# Altium PCB cm4-carrier-net.PcbDoc (part 2 of 2)
Units mm, origin at the board's own origin, x right, y up, seen from the top; angles counter-clockwise.
Board outline 91.42 x 56.51 mm, 4 copper layers (F.Cu, In1.Cu, In2.Cu, B.Cu); 70 components, 204 nets, 587 pads, 137 vias.
Unrouted connection lines stored in the file: 70.
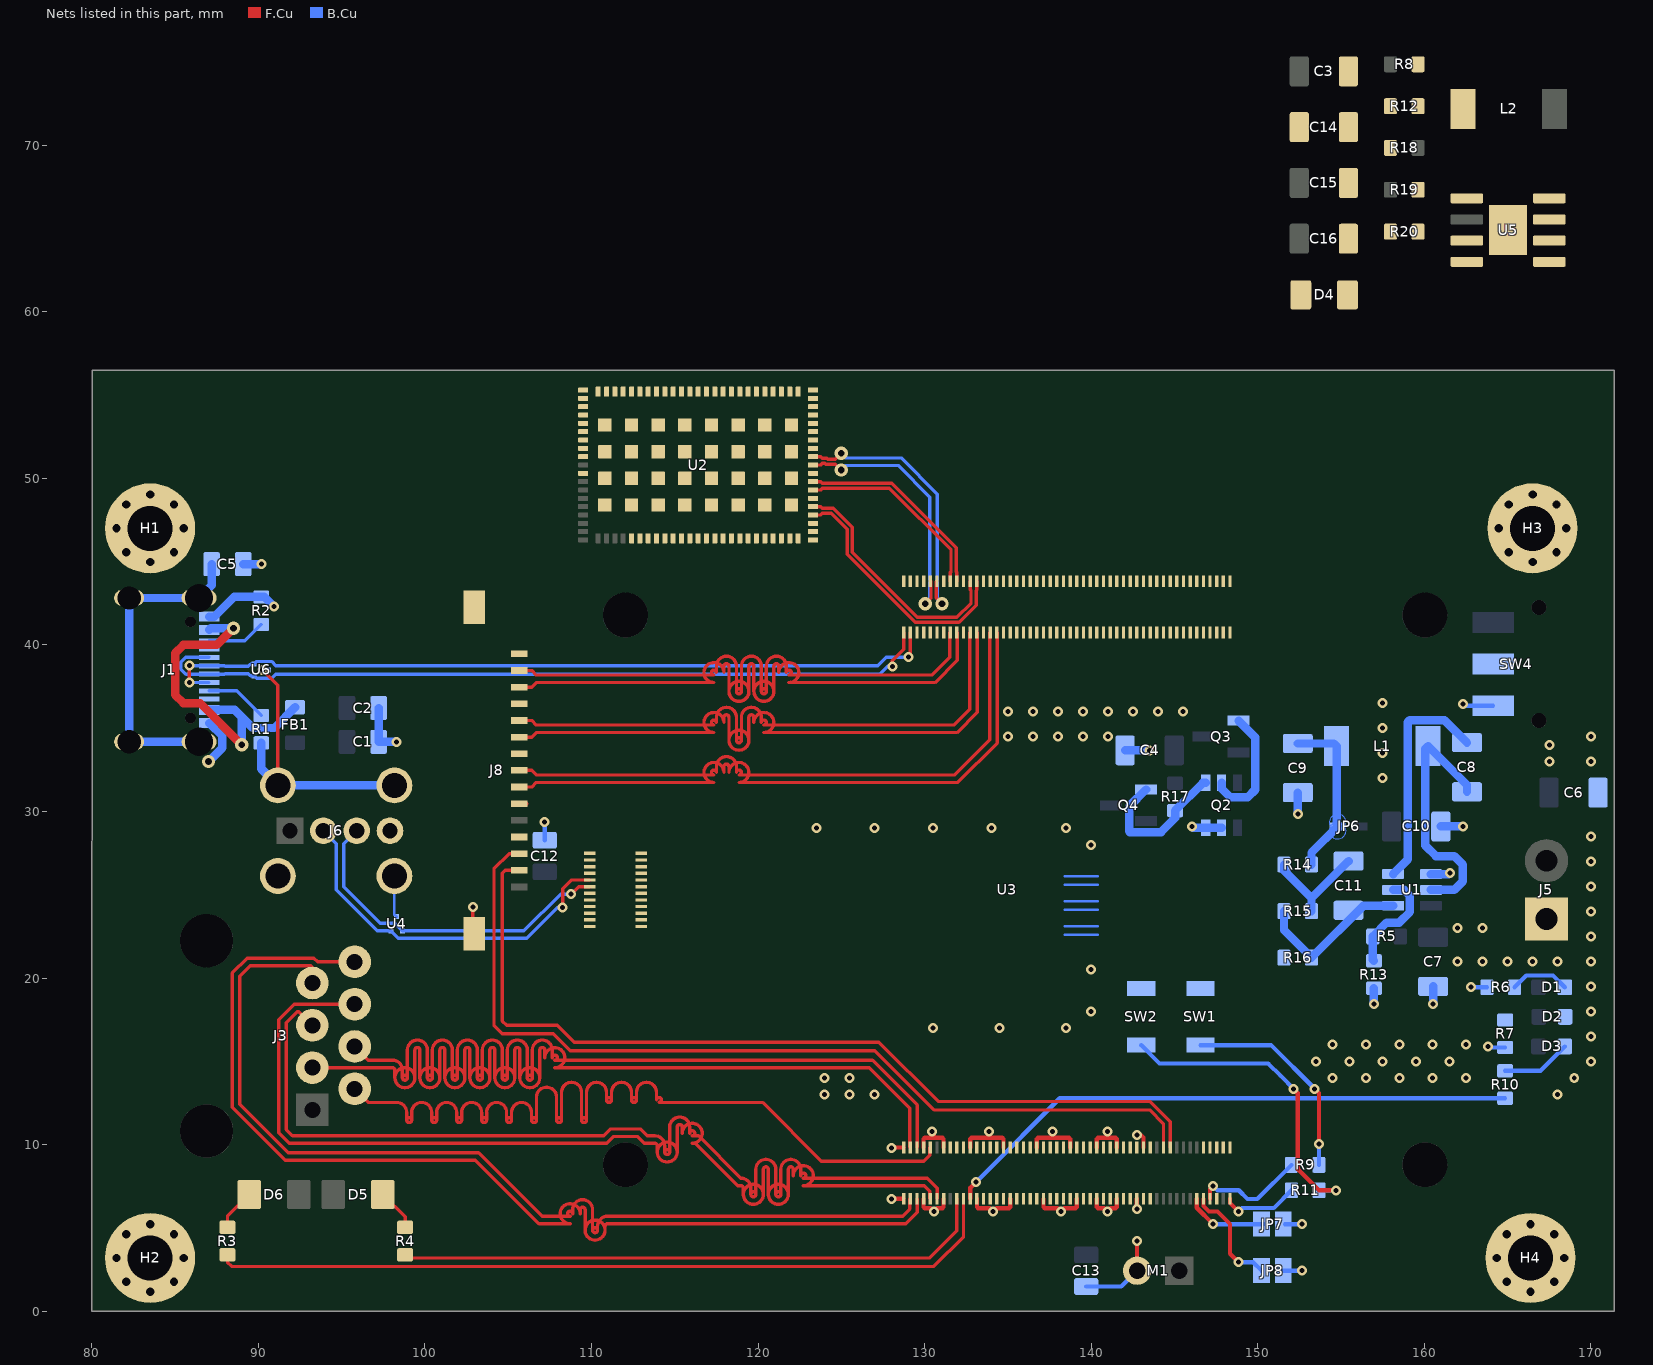
[diagram p4: the nets of this part, all layers, seen from the top]

## Via types
v1: diameter 0.6, hole 0.3, F.Cu to B.Cu, tented both sides, 130 vias
v2: diameter 0.8, hole 0.4, F.Cu to B.Cu, tented both sides, 7 vias

## Nets (pads, with @x,y where several pads share a name; then routed paths per layer and width w, separated by ;. In a path a pad name is that pad's centre, name@x,y a point inside that pad or via, vN(x,y) a via of type N, cw(c..) or ccw(c..) an arc to the next point about the centre after c; other vN are vias at no path point) (continued)
E0_TR0-: J3.2 U3.JP1_10 | length 71
  F.Cu w0.2: J3.2@95.778,13.356 96.598,12.536 98.298,12.536 cw(c98.298,11.936) 98.898,11.936 98.898,11.476 cw(c99.048,11.476) 99.048,11.326 cw(c99.048,11.476) 99.198,11.476 99.198,11.936 cw(c99.798,11.936) 99.798,12.536 cw(c99.798,11.936) 100.398,11.936 100.398,11.476 cw(c100.548,11.476) 100.548,11.326 cw(c100.548,11.476) 100.698,11.476 100.698,11.936 cw(c101.298,11.936) 101.298,12.536 cw(c101.298,11.936) 101.898,11.936 101.898,11.476 cw(c102.048,11.476) 102.048,11.326 cw(c102.048,11.476) 102.198,11.476 102.198,11.936 cw(c102.798,11.936) 102.798,12.536 cw(c102.798,11.936) 103.398,11.936 103.398,11.476 cw(c103.548,11.476) 103.548,11.326 cw(c103.548,11.476) 103.698,11.476 103.698,11.936 cw(c104.298,11.936) 104.298,12.536 cw(c104.298,11.936) 104.898,11.936 104.898,11.476 cw(c105.048,11.476) 105.048,11.326 cw(c105.048,11.476) 105.198,11.476 105.198,11.936 cw(c105.798,11.936) 105.798,12.536 cw(c105.798,11.936) 106.398,11.936 106.398,11.476 cw(c106.548,11.476) 106.548,11.326 cw(c106.548,11.476) 106.698,11.476 106.698,11.936 106.698,12.876 cw(c107.263,12.876) 107.263,13.441 107.333,13.441 cw(c107.333,12.876) 107.898,12.876 107.898,12.536 107.898,11.476 cw(c108.048,11.476) 108.048,11.326 cw(c108.048,11.476) 108.198,11.476 108.198,12.086 108.198,13.145 cw(c108.798,13.145) 108.798,13.745 cw(c108.798,13.145) 109.398,13.145 109.398,12.536 109.398,11.476 cw(c109.548,11.476) 109.548,11.326 cw(c109.548,11.476) 109.698,11.476 109.698,12.086 109.698,13.145 cw(c110.298,13.145) 110.298,13.745 cw(c110.298,13.145) 110.898,13.145 110.898,12.686 cw(c111.048,12.686) 111.048,12.536 cw(c111.048,12.686) 111.198,12.686 111.198,13.145 cw(c111.798,13.145) 111.798,13.745 cw(c111.798,13.145) 112.398,13.145 112.398,12.686 cw(c112.548,12.686) 112.548,12.536 cw(c112.548,12.686) 112.698,12.686 112.698,13.145 cw(c113.298,13.145) 113.298,13.745 cw(c113.298,13.145) 113.898,13.145 113.898,12.686 cw(c114.048,12.686) 114.048,12.536 114.986,12.536 120.264,12.536 123.791,9.009 129.955,9.009 130.311,9.365 130.311,9.809 U3.JP1_10@130.336,9.834
E0_TR1+: J3.3 U3.JP1_4 | length 88.5
  F.Cu w0.2: J3.3@93.238,14.626 98.044,14.626 cw(c98.044,14.476) 98.194,14.476 98.194,14.02 cw(c98.794,14.02) 98.794,13.42 cw(c98.794,14.02) 99.394,14.02 99.394,14.476 99.394,15.682 cw(c99.544,15.682) 99.544,15.832 cw(c99.544,15.682) 99.694,15.682 99.694,15.076 99.694,14.02 cw(c100.294,14.02) 100.294,13.42 cw(c100.294,14.02) 100.894,14.02 100.894,14.626 100.894,15.682 cw(c101.044,15.682) 101.044,15.832 cw(c101.044,15.682) 101.194,15.682 101.194,15.076 101.194,14.02 cw(c101.794,14.02) 101.794,13.42 cw(c101.794,14.02) 102.394,14.02 102.394,14.626 102.394,15.682 cw(c102.544,15.682) 102.544,15.832 cw(c102.544,15.682) 102.694,15.682 102.694,15.076 102.694,14.02 cw(c103.294,14.02) 103.294,13.42 cw(c103.294,14.02) 103.894,14.02 103.894,14.626 103.894,15.682 cw(c104.044,15.682) 104.044,15.832 cw(c104.044,15.682) 104.194,15.682 104.194,15.076 104.194,14.02 cw(c104.794,14.02) 104.794,13.42 cw(c104.794,14.02) 105.394,14.02 105.394,14.626 105.394,15.682 cw(c105.544,15.682) 105.544,15.832 cw(c105.544,15.682) 105.694,15.682 105.694,15.076 105.694,14.02 cw(c106.294,14.02) 106.294,13.42 cw(c106.294,14.02) 106.894,14.02 106.894,14.626 106.894,15.682 cw(c107.044,15.682) 107.044,15.832 cw(c107.044,15.682) 107.194,15.682 107.194,15.226 cw(c107.794,15.226) 107.794,14.626 109.099,14.626 126.682,14.626 129.111,12.197 129.111,9.859 U3.JP1_4@129.136,9.834
E0_TR1-: J3.4 U3.JP1_6 | length 68.7
  F.Cu w0.2: J3.4@95.778,15.896 96.598,15.076 98.044,15.076 cw(c98.044,14.476) 98.644,14.476 98.644,14.02 cw(c98.794,14.02) 98.794,13.87 cw(c98.794,14.02) 98.944,14.02 98.944,14.476 98.944,15.682 cw(c99.544,15.682) 99.544,16.282 cw(c99.544,15.682) 100.144,15.682 100.144,15.076 100.144,14.02 cw(c100.294,14.02) 100.294,13.87 cw(c100.294,14.02) 100.444,14.02 100.444,14.626 100.444,15.682 cw(c101.044,15.682) 101.044,16.282 cw(c101.044,15.682) 101.644,15.682 101.644,15.076 101.644,14.02 cw(c101.794,14.02) 101.794,13.87 cw(c101.794,14.02) 101.944,14.02 101.944,14.626 101.944,15.682 cw(c102.544,15.682) 102.544,16.282 cw(c102.544,15.682) 103.144,15.682 103.144,15.076 103.144,14.02 cw(c103.294,14.02) 103.294,13.87 cw(c103.294,14.02) 103.444,14.02 103.444,14.626 103.444,15.682 cw(c104.044,15.682) 104.044,16.282 cw(c104.044,15.682) 104.644,15.682 104.644,15.076 104.644,14.02 cw(c104.794,14.02) 104.794,13.87 cw(c104.794,14.02) 104.944,14.02 104.944,14.626 104.944,15.682 cw(c105.544,15.682) 105.544,16.282 cw(c105.544,15.682) 106.144,15.682 106.144,15.076 106.144,14.02 cw(c106.294,14.02) 106.294,13.87 cw(c106.294,14.02) 106.444,14.02 106.444,14.626 106.444,15.682 cw(c107.044,15.682) 107.044,16.282 cw(c107.044,15.682) 107.644,15.682 107.644,15.226 cw(c107.794,15.226) 107.794,15.076 109.099,15.076 126.868,15.076 129.561,12.383 129.561,9.859 U3.JP1_6@129.536,9.834
E0_TR2+: J3.5 U3.JP1_11 | length 64.8
  F.Cu w0.2: J3.5@93.238,17.166 92.418,17.986 92.324,17.986 91.665,17.327 91.665,10.909 92.041,10.533 110.734,10.533 111.145,10.944 112.927,10.944 113.338,10.533 113.792,10.533 cw(c113.792,9.933) 114.392,9.933 114.392,9.558 cw(c114.542,9.558) 114.542,9.408 cw(c114.542,9.558) 114.692,9.558 114.692,9.933 114.692,11.057 cw(c115.292,11.057) 115.292,11.657 cw(c115.292,11.057) 115.892,11.057 115.892,10.683 cw(c116.042,10.683) 116.042,10.533 116.425,10.533 118.965,7.993 cw(c118.965,7.393) 119.565,7.393 119.565,7.018 cw(c119.715,7.018) 119.715,6.868 cw(c119.715,7.018) 119.865,7.018 119.865,7.393 119.865,8.517 cw(c120.465,8.517) 120.465,9.117 cw(c120.465,8.517) 121.065,8.517 121.065,7.993 121.065,7.018 cw(c121.215,7.018) 121.215,6.868 cw(c121.215,7.018) 121.365,7.018 121.365,7.543 121.365,8.517 cw(c121.965,8.517) 121.965,9.117 cw(c121.965,8.517) 122.565,8.517 122.565,8.143 cw(c122.715,8.143) 122.715,7.993 126.148,7.993 130.156,7.993 130.761,7.388 130.761,6.779 U3.JP1_11@130.736,6.754
E0_TR2-: J3.6 U3.JP1_9 | length 79.1
  F.Cu w0.2: J3.6@95.778,18.436 92.138,18.436 91.215,17.513 91.215,10.723 91.855,10.083 110.921,10.083 111.332,10.494 112.74,10.494 113.151,10.083 113.792,10.083 cw(c113.792,9.933) 113.942,9.933 113.942,9.558 cw(c114.542,9.558) 114.542,8.958 cw(c114.542,9.558) 115.142,9.558 115.142,9.933 115.142,11.057 cw(c115.292,11.057) 115.292,11.207 cw(c115.292,11.057) 115.442,11.057 115.442,10.683 cw(c116.042,10.683) 116.042,10.083 116.239,10.083 118.779,7.543 118.965,7.543 cw(c118.965,7.393) 119.115,7.393 119.115,7.018 cw(c119.715,7.018) 119.715,6.418 cw(c119.715,7.018) 120.315,7.018 120.315,7.393 120.315,8.517 cw(c120.465,8.517) 120.465,8.667 cw(c120.465,8.517) 120.615,8.517 120.615,7.993 120.615,7.018 cw(c121.215,7.018) 121.215,6.418 cw(c121.215,7.018) 121.815,7.018 121.815,7.543 121.815,8.517 cw(c121.965,8.517) 121.965,8.667 cw(c121.965,8.517) 122.115,8.517 122.115,8.143 cw(c122.715,8.143) 122.715,7.543 126.148,7.543 129.97,7.543 130.311,7.202 130.311,6.779 U3.JP1_9@130.336,6.754
E0_TR3+: J3.7 U3.JP1_3 | length 61.5
  F.Cu w0.2: J3.7@93.238,19.706 93.238,20.658 93.145,20.751 89.501,20.751 88.871,20.121 88.871,12.433 91.787,9.517 103.217,9.517 107.027,5.707 108.712,5.707 cw(c108.712,5.857) 108.862,5.857 108.862,6.096 cw(c109.462,6.096) 109.462,6.696 cw(c109.462,6.096) 110.062,6.096 110.062,5.857 110.062,4.868 cw(c110.212,4.868) 110.212,4.718 cw(c110.212,4.868) 110.362,4.868 110.362,5.107 cw(c110.962,5.107) 110.962,5.707 112.617,5.707 128.685,5.707 129.111,6.133 129.111,6.729 U3.JP1_3@129.136,6.754
E0_TR3-: J3.8 U3.JP1_5 | length 69.7
  F.Cu w0.2: J3.8@95.778,20.976 93.556,20.976 93.331,21.201 89.315,21.201 88.421,20.307 88.421,12.247 91.601,9.067 103.031,9.067 106.841,5.257 108.712,5.257 cw(c108.712,5.857) 109.312,5.857 109.312,6.096 cw(c109.462,6.096) 109.462,6.246 cw(c109.462,6.096) 109.612,6.096 109.612,5.857 109.612,4.868 cw(c110.212,4.868) 110.212,4.268 cw(c110.212,4.868) 110.812,4.868 110.812,5.107 cw(c110.962,5.107) 110.962,5.257 112.617,5.257 128.871,5.257 129.561,5.947 129.561,6.729 U3.JP1_5@129.536,6.754
GND: C1.2 C2.2 C3.2 C4.2 C5.2 C6.2 C7.2 C9.2 C10.1 C12.2 C13.2 C15.2 C16.2 D4.2 H1.1 H2.1 H3.1 H4.1 J1.A1 J1.A12 J1.B1 J1.B12 J5.1 J6.4 J6.5 J8.1 J8.4 J8.7 J8.10 J8.MP JP7.1 JP8.1 M1.2 Q2.2 Q2.3 R1.1 R2.1 R6.2 R7.2 R12.2 R13.2 R16.2 R20.2 SW1.2 SW2.2 SW4.3 U1.1 U2.1 U2.2 U2.3 U2.6 U2.9 U2.12 U2.15 U2.16 U2.17 U2.18 U2.19 U2.20 U2.21 U2.22 U2.23 U2.24 U2.25 U2.26 U2.27 U2.28 U2.29 U2.30 U2.31 U2.32 U2.33 U2.34 U2.35 U2.36 U2.38 U2.39 U2.40 U2.41 U2.42 U2.43 U2.44 U2.45 U2.46 U2.47 U2.48 U2.51 U2.55 U2.68 U2.69 U2.70 U2.71 U2.72 U2.73 U2.74 U2.75 U2.79 U2.80 U2.81 U2.86 U2.87 U2.88 U2.89 U2.90 U2.91 U2.92 U2.93 U2.94 U2.95 U2.96 U2.97 U2.98 U2.99 U2.100 U2.101 U2.102 U2.103 U2.104 U2.105 U2.106 U2.107 U2.108 U2.109 U2.110 U2.111 U2.112 U2.113 U2.114 U2.115 U2.116 U2.117 U2.118 U2.119 U2.120 U3.JP1_1 U3.JP1_2 U3.JP1_7 U3.JP1_8 U3.JP1_13 U3.JP1_14 U3.JP1_22 U3.JP1_23 U3.JP1_32 U3.JP1_33 U3.JP1_42 U3.JP1_43 U3.JP1_52 U3.JP1_53 U3.JP1_59 U3.JP1_60 U3.JP1_65 U3.JP1_66 U3.JP1_71 U3.JP1_74 U3.JP1_98 U3.JP2_7 U3.JP2_8 U3.JP2_13 U3.JP2_14 U3.JP2_19 U3.JP2_20 U3.JP2_25 U3.JP2_26 U3.JP2_31 U3.JP2_32 U3.JP2_37 U3.JP2_38 U3.JP2_44 U3.JP2_50 U3.JP2_55 U3.JP2_56 U3.JP2_61 U3.JP2_62 U3.JP2_67 U3.JP2_68 U3.JP2_73 U3.JP2_74 U3.JP2_79 U3.JP2_80 U3.JP2_85 U3.JP2_86 U3.JP2_91 U3.JP2_92 U3.JP2_97 U3.JP2_98 U3.JP3_1 U3.JP3_2 U3.JP3_7 U3.JP3_13 U3.JP3_14 U3.JP3_17 U3.JP3_20 U3.JP3_23 U4.3 U5.7 U5.9 U6.3 | length 95.8
  F.Cu w0.2: v1(90.251,38.494) 91.168,37.577 J6.5@91.168,31.57 ; v1(102.87,24.278) 102.87,22.764 J8.MP@102.964,22.67
  F.Cu w0.254: J8.MP@102.964,42.17 J8.MP@102.964,42.27 ; J8.10@105.364,30.47 J8.10@105.664,30.47 J8.10@106.076,30.47 ; J8.7@105.364,33.47 J8.7@105.664,33.47 ; J8.4@105.364,36.47 J8.4@105.664,36.47 J8.4@105.51,36.47 ; J8.1@105.364,39.47 J8.1@105.664,39.47 ; v1(128.016,6.752) 128.018,6.754 U3.JP1_1@128.736,6.754 ; v1(128.016,9.8) 128.05,9.834 U3.JP1_2@128.736,9.834 ; U3.JP1_7@129.936,6.754 129.936,6.25 130.009,6.177 130.369,6.177 v1(130.556,5.99) 130.743,6.177 131.063,6.177 131.136,6.25 U3.JP1_13@131.136,6.754 ; U3.JP1_8@129.936,9.834 129.936,10.338 130.009,10.411 130.556,10.411 ; v1(130.438,10.797) 130.556,10.679 130.556,10.411 ; U3.JP1_14@131.136,9.834 131.136,10.338 131.063,10.411 130.556,10.411 ; U3.JP1_22@132.736,9.834 132.736,10.338 132.809,10.411 133.858,10.411 ; U3.JP1_23@133.136,6.754 133.136,6.25 133.209,6.177 133.925,6.177 v1(134.112,5.99) 134.299,6.177 135.063,6.177 135.136,6.25 U3.JP1_33@135.136,6.754 ; v1(133.858,10.797) 133.858,10.411 ; U3.JP1_32@134.736,9.834 134.736,10.338 134.663,10.411 133.858,10.411 ; U3.JP1_42@136.736,9.834 136.736,10.338 136.809,10.411 137.668,10.411 ; U3.JP1_43@137.136,6.754 137.136,6.25 137.209,6.177 137.989,6.177 v1(138.176,5.99) 138.363,6.177 139.063,6.177 139.136,6.25 U3.JP1_53@139.136,6.754 ; v1(137.668,10.797) 137.668,10.411 ; U3.JP1_52@138.736,9.834 138.736,10.338 138.663,10.411 137.668,10.411 ; U3.JP1_59@140.336,6.754 140.336,6.25 140.409,6.177 140.783,6.177 v1(140.97,5.99) 141.157,6.177 141.463,6.177 141.536,6.25 U3.JP1_65@141.536,6.754 ; U3.JP1_60@140.336,9.834 140.336,10.338 140.409,10.411 140.97,10.411 ; v1(140.97,10.797) 140.97,10.411 ; U3.JP1_66@141.536,9.834 141.536,10.338 141.463,10.411 140.97,10.411 ; v1(142.735,6.14) U3.JP1_71@142.736,6.754 ; v1(142.748,4.212) 142.748,3.704 142.753,3.699 M1.2@142.753,2.434 ; v1(142.748,10.584) 142.99,10.584 143.136,10.438 U3.JP1_74@143.136,9.834
  B.Cu w0.15: J6.5@98.168,26.13 98.168,23.817 U4.3@98.298,23.687 ; 138.4,22.606 140.4,22.606 ; 138.4,23.106 140.4,23.106 ; 138.4,24.106 140.4,24.106 ; 138.4,24.606 140.4,24.606 ; 138.4,25.606 140.4,25.606 ; 138.4,26.106 140.4,26.106
  B.Cu w0.2: v1(90.251,38.494) 90.259,38.502 U6.3@90.595,38.502
  B.Cu w0.254: C12.2@107.188,28.276 v1(107.188,29.358) ; C13.2@139.7,1.484 141.803,1.484 M1.2@142.753,2.434 ; JP8.1@151.526,2.434 v1(152.654,2.434) ; JP7.1@151.638,5.228 v1(152.654,5.228) ; v1(162.306,36.47) 162.422,36.354 SW4.3@164.128,36.354 ; v1(162.814,19.452) R6.2@163.767,19.452 ; v1(163.83,15.896) 163.893,15.833 R7.2@164.846,15.833
  B.Cu w0.508: v2(87,33.006) 87.019,33.006 87.841,33.828 87.841,34.535 87.075,35.302 J1.B12@87.037,35.302 J1.B12@87.357,35.302 ; J1.B1@87.037,41.702 87.357,41.702 88.538,42.883 R2.1@90.17,42.883 90.361,42.883 v1(90.932,42.312) ; C5.2@89.088,44.852 v1(90.17,44.852) ; R1.1@90.17,34.121 90.17,32.568 J6.5@91.168,31.57 J6.5@98.168,31.57 ; C2.2@97.216,36.216 C1.2@97.216,34.184 v1(98.298,34.184) ; C4.2@142.035,33.676 v1(143.51,33.676) ; v1(146.05,29.104) 146.13,29.024 Q2.3@146.878,29.024 Q2.2@147.828,29.024 ; v1(152.4,29.866) C9.2@152.4,31.136 ; v1(156.972,18.436) R13.2@156.972,19.389 ; U1.1@160.396,26.244 161.478,26.244 v1(161.544,26.31) ; v1(160.528,18.436) C7.2@160.528,19.501 ; C10.1@160.987,29.104 v1(162.306,29.104)
  other v1: 124,13.006 125.5,13.006 127,13.006 168,13.006 124,14.006 125.5,14.006 154.5,14.006 156.5,14.006 158.5,14.006 160.5,14.006 162.5,14.006 169,14.006 153.5,15.006 155.5,15.006 157.5,15.006 159.5,15.006 161.5,15.006 170,15.006 154.5,16.006 156.5,16.006 158.5,16.006 160.5,16.006 162.5,16.006 170,16.506 130.5,17.006 134.5,17.006 138.5,17.006 140,18.006 170,18.006 170,19.506 140,20.506 162,21.006 163.5,21.006 165,21.006 166.5,21.006 168,21.006 170,21.006 170,22.506 162,23.006 163.5,23.006 170,24.006 170,25.506 170,27.006 140,28.006 170,28.506 123.5,29.006 127,29.006 130.5,29.006 134,29.006 138.5,29.006 157.5,32.006 167.5,33.006 170,33.006 157.5,33.506 167.5,34.006 135,34.506 136.5,34.506 138,34.506 139.5,34.506 141,34.506 170,34.506 157.5,35.006 135,36.006 136.5,36.006 138,36.006 139.5,36.006 141,36.006 142.5,36.006 144,36.006 145.5,36.006 157.5,36.506
HDMI_CEC: U3.JP2_51
HDMI_CK+: U3.JP2_88
HDMI_CK-: U3.JP2_90
HDMI_D0+: U3.JP2_82
HDMI_D0-: U3.JP2_84
HDMI_D1+: U3.JP2_76
HDMI_D1-: U3.JP2_78
HDMI_D2+: U3.JP2_70
HDMI_D2-: U3.JP2_72
HDMI_SCL: U3.JP2_100
HDMI_SDA: U3.JP2_99
I2C1_SCL0-: J8.13 U3.JP1_80 | length 55.4
  F.Cu w0.2: J8.13@105.664,27.47 105.046,27.47 104.14,26.564 104.14,17.166 104.648,16.658 107.696,16.658 108.712,15.642 127,15.642 130.556,12.086 143.51,12.086 144.336,11.26 U3.JP1_80@144.336,9.834
I2C1_SDA0+: J8.14 U3.JP1_82 | length 54.1
  F.Cu w0.2: J8.14@105.664,26.47 104.808,26.47 104.648,26.31 104.648,17.42 104.902,17.166 107.95,17.166 108.966,16.15 127.254,16.15 130.81,12.594 143.51,12.594 144.736,11.368 U3.JP1_82@144.736,9.834
MIPI_CSI_RX0_D0N: J8.2 U3.JP2_15 | length 40.1
  F.Cu w0.2: J8.2@105.664,38.47 106.414,38.47 106.689,38.195 117.348,38.195 cw(c117.348,38.345) 117.498,38.345 117.498,38.724 cw(c118.098,38.724) 118.098,39.324 cw(c118.098,38.724) 118.698,38.724 118.698,38.345 118.698,37.215 cw(c118.848,37.215) 118.848,37.065 cw(c118.848,37.215) 118.998,37.215 118.998,37.745 118.998,38.724 cw(c119.598,38.724) 119.598,39.324 cw(c119.598,38.724) 120.198,38.724 120.198,38.195 120.198,37.215 cw(c120.348,37.215) 120.348,37.065 cw(c120.348,37.215) 120.498,37.215 120.498,37.745 120.498,38.724 cw(c121.098,38.724) 121.098,39.324 cw(c121.098,38.724) 121.698,38.724 121.698,38.345 cw(c121.848,38.345) 121.848,38.195 122.54,38.195 130.439,38.195 131.511,39.267 U3.JP2_15@131.511,40.729
MIPI_CSI_RX0_D0P: J8.3 U3.JP2_17 | length 49.3
  F.Cu w0.2: J8.3@105.664,37.47 106.414,37.47 106.689,37.745 117.348,37.745 cw(c117.348,38.345) 117.948,38.345 117.948,38.724 cw(c118.098,38.724) 118.098,38.874 cw(c118.098,38.724) 118.248,38.724 118.248,38.345 118.248,37.215 cw(c118.848,37.215) 118.848,36.615 cw(c118.848,37.215) 119.448,37.215 119.448,37.745 119.448,38.724 cw(c119.598,38.724) 119.598,38.874 cw(c119.598,38.724) 119.748,38.724 119.748,38.195 119.748,37.215 cw(c120.348,37.215) 120.348,36.615 cw(c120.348,37.215) 120.948,37.215 120.948,37.745 120.948,38.724 cw(c121.098,38.724) 121.098,38.874 cw(c121.098,38.724) 121.248,38.724 121.248,38.345 cw(c121.848,38.345) 121.848,37.745 122.54,37.745 130.625,37.745 131.961,39.081 U3.JP2_17@131.961,40.729
MIPI_CSI_RX1_D0N: J8.5 U3.JP2_21 | length 39.1
  F.Cu w0.2: J8.5@105.664,35.47 106.414,35.47 106.689,35.195 117.348,35.195 cw(c117.348,35.345) 117.498,35.345 117.498,35.658 cw(c118.098,35.658) 118.098,36.258 cw(c118.098,35.658) 118.698,35.658 118.698,35.345 118.698,34.281 cw(c118.848,34.281) 118.848,34.131 cw(c118.848,34.281) 118.998,34.281 118.998,34.745 118.998,35.658 cw(c119.598,35.658) 119.598,36.258 cw(c119.598,35.658) 120.198,35.658 120.198,35.345 cw(c120.348,35.345) 120.348,35.195 121.01,35.195 131.757,35.195 132.711,36.149 U3.JP2_21@132.711,40.729
MIPI_CSI_RX1_D0P: J8.6 U3.JP2_23 | length 45.5
  F.Cu w0.2: J8.6@105.664,34.47 106.414,34.47 106.689,34.745 117.348,34.745 cw(c117.348,35.345) 117.948,35.345 117.948,35.658 cw(c118.098,35.658) 118.098,35.808 cw(c118.098,35.658) 118.248,35.658 118.248,35.345 118.248,34.281 cw(c118.848,34.281) 118.848,33.681 cw(c118.848,34.281) 119.448,34.281 119.448,34.745 119.448,35.658 cw(c119.598,35.658) 119.598,35.808 cw(c119.598,35.658) 119.748,35.658 119.748,35.345 cw(c120.348,35.345) 120.348,34.745 121.01,34.745 131.943,34.745 133.161,35.963 U3.JP2_23@133.161,40.729
MIPI_CSI_RX_CLK0N: J8.8 U3.JP2_27 | length 38.2
  F.Cu w0.2: J8.8@105.664,32.47 106.414,32.47 106.689,32.195 117.348,32.195 cw(c117.348,32.345) 117.498,32.345 117.498,32.7 cw(c118.098,32.7) 118.098,33.3 cw(c118.098,32.7) 118.698,32.7 118.698,32.345 cw(c118.848,32.345) 118.848,32.195 120.092,32.195 131.805,32.195 133.911,34.301 U3.JP2_27@133.911,40.729
MIPI_CSI_RX_CLK0P: J8.9 U3.JP2_29 | length 41.7
  F.Cu w0.2: J8.9@105.664,31.47 106.414,31.47 106.689,31.745 117.348,31.745 cw(c117.348,32.345) 117.948,32.345 117.948,32.7 cw(c118.098,32.7) 118.098,32.85 cw(c118.098,32.7) 118.248,32.7 118.248,32.345 cw(c118.848,32.345) 118.848,31.745 120.092,31.745 131.991,31.745 134.361,34.115 U3.JP2_29@134.361,40.729
Net-(C11-Pad1): C11.1 R14.2 R15.1 | length 6.6
  B.Cu w0.508: R14.2@151.575,26.818 151.575,26.45 153.225,24.8 ; R15.1@153.225,24.024 153.225,24.8 ; C11.1@155.448,27.023 153.225,24.8
Net-(D1-K): D1.1 R6.1 | length 3.6
  B.Cu w0.254: R6.1@165.417,19.452 166.119,20.154 167.725,20.154 D1.1@168.427,19.452
Net-(D2-K): D2.1 R7.1
Net-(D3-K): D3.1 R10.2 | length 4.2
  B.Cu w0.254: R10.2@164.846,14.435 166.967,14.435 D3.1@168.427,15.896
Net-(D4-K): C14.2 D4.1 L2.1 U5.8
Net-(D5-K): D5.1 R4.1 | length 2.5
  F.Cu w0.2: D5.1@97.47,7.006 98.806,5.669 R4.1@98.806,5.037
Net-(D6-K): D6.1 R3.1 | length 2.5
  F.Cu w0.2: R3.1@88.138,5.037 88.138,5.699 D6.1@89.444,7.006
Net-(J1-CC1): J1.A5 R1.2 | length 3.7
  B.Cu w0.2: J1.A5@87.037,37.252 88.689,37.252 R1.2@90.17,35.771
Net-(J1-CC2): J1.B5 R2.2 | length 3.5
  B.Cu w0.2: J1.B5@87.037,40.252 89.189,40.252 R2.2@90.17,41.233
Net-(J1-SHIELD): C5.1 J1.S1 | length 19.4
  B.Cu w0.508: J1.S1@86.437,34.182 J1.S1@82.237,34.182 J1.S1@82.237,42.822 J1.S1@86.437,42.822 87.188,43.573 C5.1@87.188,44.852
Net-(JP6-B): C9.1 JP6.2 L1.2 R14.1 | length 10.2
  B.Cu w0.508: C9.1@152.4,34.086 154.574,34.086 L1.2@154.73,33.93 154.73,29.172 JP6.2@154.798,29.104 153.225,27.531 R14.1@153.225,26.818
Net-(Q2-GATE): Q2.5 Q3.1 | length 7.3
  B.Cu w0.508: Q2.5@147.828,31.724 147.828,31.378 148.336,30.87 149.407,30.87 149.848,31.311 149.848,34.45 Q3.1@148.844,35.454
Net-(Q2-STAT): Q2.4 Q4.1 R17.2 | length 9
  B.Cu w0.508: Q4.1@143.29,31.324 142.286,30.32 142.286,28.804 142.32,28.77 144.192,28.77 145.034,29.612 R17.2@145.034,30.057 146.701,31.724 Q2.4@146.878,31.724
Net-(R9-Pad1): R9.1 SW1.1 | length 12.6
  F.Cu w0.254: v1(153.416,13.356) 153.67,13.102 v1(153.67,10.054)
  B.Cu w0.254: SW1.1@146.558,15.974 150.798,15.974 v1(153.416,13.356) ; R9.1@153.67,8.784 v1(153.67,10.054)
Net-(R11-Pad1): R11.1 SW2.1 | length 19
  F.Cu w0.254: v1(152.146,13.356) 152.4,13.102 152.4,8.53 153.67,7.26 v1(154.686,7.26)
  B.Cu w0.254: SW2.1@143.002,15.974 144.096,14.88 147.066,14.88 150.622,14.88 151.384,14.118 v1(152.146,13.356) ; R11.1@153.67,7.26 v1(154.686,7.26)
Net-(U1-BOOT): C8.1 U1.6 | length 13.6
  B.Cu w0.508: U1.6@158.12,26.244 159.004,27.127 159.004,35.362 159.126,35.484 161.211,35.484 C8.1@162.56,34.135
Net-(U1-EN): R5.2 R13.1 U1.5 | length 6.5
  B.Cu w0.508: R13.1@156.972,21.039 156.909,21.102 R5.2@156.909,22.5 157.738,23.329 158.496,23.329 159.137,23.97 159.137,24.94 158.783,25.294 U1.5@158.12,25.294
Net-(U1-FB): C11.2 R15.2 R16.1 U1.4 | length 9.7
  B.Cu w0.508: R15.2@151.575,24.024 151.575,22.88 R16.1@153.225,21.23 156.339,24.344 U1.4@158.12,24.344
Net-(U1-SW): C8.2 L1.1 U1.2 | length 15.6
  B.Cu w0.508: U1.2@160.396,25.294 161.798,25.294 162.306,25.802 162.306,26.818 161.798,27.326 160.693,27.326 160.058,27.961 160.058,33.758 L1.1@160.23,33.93 162.56,31.6 C8.2@162.56,31.185
Net-(U3A-{\B\T\_\D\I\S\}\)\: JP8.2 U3.JP1_91 | length 6.6
  F.Cu w0.254: U3.JP1_91@146.736,6.754 146.736,6.32 147.066,5.99 147.32,5.99 147.574,5.99 148.336,5.228 148.336,3.45 v1(148.844,2.942)
  B.Cu w0.254: v1(148.844,2.942) 149.718,2.942 JP8.2@150.226,2.434
Net-(U3A-{\W\L\_\D\I\S\}\)\: JP7.2 U3.JP1_89 | length 5
  F.Cu w0.254: U3.JP1_89@146.336,6.754 146.336,6.212 v1(147.32,5.228)
  B.Cu w0.254: v1(147.32,5.228) JP7.2@150.338,5.228
Net-(U5-BST): C14.1 U5.1
Net-(U5-EN): R8.2 R12.1 U5.3
Net-(U5-FB): R19.2 R20.1 U5.5
Net-(U5-PGOOD): R18.1 U5.4
PCIE_REFCLK_N: U2.10 U3.JP2_10 | length 16.1
  F.Cu w0.203: U2.10@123.3,50.806 123.75,50.806 123.848,50.903 124,50.903 124.05,50.853 124.644,50.853 v2(124.993,50.504) ; v2(130.034,42.484) 130.384,42.833 130.384,43.786 U3.JP2_10@130.336,43.834
  B.Cu w0.2: v2(124.993,50.504) 125.27,50.781 126,50.781 128.407,50.781 130.311,48.877 130.311,42.761 v2(130.034,42.484)
PCIE_REFCLK_P: U2.11 U3.JP2_12 | length 16.9
  F.Cu w0.203: U2.11@123.3,51.306 123.75,51.306 123.848,51.208 124.122,51.208 124.172,51.158 124.644,51.158 v2(124.993,51.507) ; U3.JP2_12@130.736,43.834 130.688,43.786 130.688,42.833 v2(131.038,42.484)
  B.Cu w0.2: v2(124.993,51.507) 125.27,51.231 126,51.231 128.593,51.231 130.761,49.063 130.761,42.761 v2(131.038,42.484)
PCIE_RX_N: U2.8 U3.JP2_18 | length 12.3
  F.Cu w0.203: U2.8@123.3,49.806 123.75,49.806 123.848,49.708 128.013,49.708 131.888,45.833 131.888,44.406 131.936,44.359 U3.JP2_18@131.936,43.834
PCIE_RX_P: U2.7 U3.JP2_16 | length 11.7
  F.Cu w0.203: U2.7@123.3,49.306 123.75,49.306 123.848,49.403 127.887,49.403 131.584,45.707 131.584,44.406 131.536,44.359 U3.JP2_16@131.536,43.834
PCIE_TX_N: U2.4 U3.JP2_24 | length 15.3
  F.Cu w0.203: U2.4@123.3,47.806 123.75,47.806 123.848,47.903 124.387,47.903 125.348,46.943 125.348,45.443 129.437,41.353 132.063,41.353 133.088,42.379 133.088,43.261 133.136,43.309 U3.JP2_24@133.136,43.834
PCIE_TX_P: U2.5 U3.JP2_22 | length 14.8
  F.Cu w0.203: U2.5@123.3,48.306 123.75,48.306 123.848,48.208 124.513,48.208 125.652,47.069 125.652,45.569 129.563,41.658 131.937,41.658 132.784,42.505 132.784,43.261 132.736,43.309 U3.JP2_22@132.736,43.834
PI_GLOBAL_EN: R11.2 U3.JP1_99 | length 4.7
  F.Cu w0.254: U3.JP1_99@148.336,6.754 148.336,6.498 v1(148.844,5.99)
  B.Cu w0.254: v1(148.844,5.99) 149.059,6.205 150.965,6.205 R11.2@152.02,7.26
PI_LED_nACT: R10.1 U3.JP1_21 | length 35
  F.Cu w0.254: U3.JP1_21@132.736,6.754 132.736,7.408 v1(133.096,7.768)
  B.Cu w0.254: v1(133.096,7.768) 133.604,8.276 138.113,12.785 R10.1@164.846,12.785
PI_nRPI_BOOT: R9.2 U3.JP1_93 | length 6.7
  F.Cu w0.254: U3.JP1_93@147.136,6.754 147.136,7.33 v1(147.32,7.514)
  B.Cu w0.254: v1(147.32,7.514) 147.574,7.26 148.861,7.26 149.388,6.733 149.969,6.733 R9.2@152.02,8.784
SD_CLK: U3.JP1_57
SD_CMD: U3.JP1_62
SD_D0: U3.JP1_63
SD_D1: U3.JP1_67
SD_D2: U3.JP1_69
SD_D3: U3.JP1_61
SD_PWR_ON: U3.JP1_75
unconnected-(J1-SBU1-PadA8): J1.A8
unconnected-(J1-SBU2-PadB8): J1.B8
unconnected-(J8-Pin_12-Pad12): J8.12
unconnected-(U2-CLKREQ_L-Pad78): U2.78
unconnected-(U2-INTR-Pad77): U2.77
unconnected-(U2-PGOOD4-Pad37): U2.37
unconnected-(U2-PMIC_EN-Pad53): U2.53
unconnected-(U2-RESERVED-Pad49): U2.49
unconnected-(U2-RESERVED-Pad50): U2.50
unconnected-(U2-RESERVED-Pad52): U2.52
unconnected-(U2-RESERVED-Pad84): U2.84
unconnected-(U2-RESERVED-Pad85): U2.85
unconnected-(U2-RST_L-Pad76): U2.76
unconnected-(U2-SD_ALARM-Pad82): U2.82
unconnected-(U2-USB2_D_N-Pad14): U2.14
unconnected-(U2-USB2_D_P-Pad13): U2.13
unconnected-(U2-USB_SEL-Pad83): U2.83
unconnected-(U3A-GPIO0_C6{slash}PWM7_IR-PadJP1_72): U3.JP1_72
unconnected-(U3A-GPIO0_D0{slash}UART2_RX_M0-PadJP1_51): U3.JP1_51
unconnected-(U3A-GPIO0_D1{slash}UART2_TX_M0-PadJP1_55): U3.JP1_55
unconnected-(U3A-GPIO1_A0{slash}I2C3_SDA_M0-PadJP1_36): U3.JP1_36
unconnected-(U3A-GPIO1_A1{slash}I2C3_SCL_M0-PadJP1_35): U3.JP1_35
unconnected-(U3A-GPIO3_C6{slash}I2S1_MCLK_M1-PadJP1_50): U3.JP1_50
unconnected-(U3A-GPIO3_C7{slash}I2S1_SCLK_M1-PadJP1_49): U3.JP1_49
unconnected-(U3A-GPIO3_D0{slash}I2S1_LRCK_M1-PadJP1_26): U3.JP1_26
unconnected-(U3A-GPIO3_D1{slash}I2S1_SDO_M1-PadJP1_25): U3.JP1_25
unconnected-(U3A-GPIO3_D2{slash}I2S1_SDI_M1-PadJP1_27): U3.JP1_27
unconnected-(U3A-GPIO3_D3-PadJP1_24): U3.JP1_24
unconnected-(U3A-GPIO3_D4-PadJP1_30): U3.JP1_30
unconnected-(U3A-GPIO3_D5-PadJP1_29): U3.JP1_29
unconnected-(U3A-GPIO3_D7-PadJP1_28): U3.JP1_28
unconnected-(U3A-GPIO4_A0-PadJP1_48): U3.JP1_48
unconnected-(U3A-GPIO4_A1-PadJP1_45): U3.JP1_45
unconnected-(U3A-GPIO4_A2-PadJP1_46): U3.JP1_46
unconnected-(U3A-GPIO4_A3-PadJP1_47): U3.JP1_47
unconnected-(U3A-GPIO4_A4-PadJP1_41): U3.JP1_41
unconnected-(U3A-GPIO4_A5-PadJP1_34): U3.JP1_34
unconnected-(U3A-GPIO4_A6{slash}SPI3_CS0_M0-PadJP1_39): U3.JP1_39
unconnected-(U3A-GPIO4_A7{slash}SPI3_CS1_M0-PadJP1_37): U3.JP1_37
unconnected-(U3A-GPIO4_B0{slash}SPI3_MISO_M0-PadJP1_40): U3.JP1_40
unconnected-(U3A-GPIO4_B2{slash}SPI3_MOSI_M0-PadJP1_44): U3.JP1_44
unconnected-(U3A-GPIO4_B3{slash}SPI3_CLK_M0-PadJP1_38): U3.JP1_38
unconnected-(U3A-GPIO4_B4{slash}I2C2_SDA_M1-PadJP1_58): U3.JP1_58
unconnected-(U3A-GPIO4_B5{slash}I2C2_SCL_M1-PadJP1_56): U3.JP1_56
unconnected-(U3A-GPIO4_C0-PadJP1_31): U3.JP1_31
unconnected-(U3A-GPIO4_C3-PadJP1_54): U3.JP1_54
unconnected-(U3A-RESERVED_JP1_16-PadJP1_16): U3.JP1_16
unconnected-(U3A-RESERVED_JP1_18-PadJP1_18): U3.JP1_18
unconnected-(U3A-RESERVED_JP1_20-PadJP1_20): U3.JP1_20
unconnected-(U3A-RESERVED_JP1_64-PadJP1_64): U3.JP1_64
unconnected-(U3A-RESERVED_JP1_73-PadJP1_73): U3.JP1_73
unconnected-(U3A-SARADC_VIN1-PadJP1_70): U3.JP1_70
unconnected-(U3A-SARADC_VIN2-PadJP1_96): U3.JP1_96
unconnected-(U3A-SARADC_VIN3-PadJP1_94): U3.JP1_94
unconnected-(U3A-SDMMC0_DET_L-PadJP1_76): U3.JP1_76
unconnected-(U3A-SW_RECOVERY-PadJP1_68): U3.JP1_68
unconnected-(U3A-WORK_LED-PadJP1_95): U3.JP1_95
unconnected-(U3A-{\E\X\T\R\S\T\}\-\P\a\d\J\P\1\_\1\0\0\)\: U3.JP1_100
unconnected-(U3A-{\R\E\S\E\T\}\-\P\a\d\J\P\1\_\9\2\)\: U3.JP1_92
unconnected-(U3B-EDP_SCL{slash}I2C4_SCL_M1-PadJP2_47): U3.JP2_47
unconnected-(U3B-EDP_SDA{slash}I2C4_SDA_M1-PadJP2_45): U3.JP2_45
unconnected-(U3B-EDP_TX_AUXN-PadJP2_66): U3.JP2_66
unconnected-(U3B-EDP_TX_AUXP-PadJP2_64): U3.JP2_64
unconnected-(U3B-EDP_TX_D0N-PadJP2_60): U3.JP2_60
unconnected-(U3B-EDP_TX_D0P-PadJP2_58): U3.JP2_58
unconnected-(U3B-EDP_TX_D1N-PadJP2_54): U3.JP2_54
unconnected-(U3B-EDP_TX_D1P-PadJP2_52): U3.JP2_52
unconnected-(U3B-EDP_TX_D2N-PadJP2_48): U3.JP2_48
unconnected-(U3B-EDP_TX_D2P-PadJP2_46): U3.JP2_46
unconnected-(U3B-EDP_TX_D3N-PadJP2_49): U3.JP2_49
unconnected-(U3B-EDP_TX_D3P-PadJP2_43): U3.JP2_43
unconnected-(U3B-HDMI_TX_HPD_PORT-PadJP2_53): U3.JP2_53
unconnected-(U3B-MIPI_CSI_RX0_D2N-PadJP2_33): U3.JP2_33
unconnected-(U3B-MIPI_CSI_RX0_D2P-PadJP2_35): U3.JP2_35
unconnected-(U3B-MIPI_CSI_RX0_D3N-PadJP2_39): U3.JP2_39
unconnected-(U3B-MIPI_CSI_RX0_D3P-PadJP2_41): U3.JP2_41
unconnected-(U3B-MIPI_CSI_RX1_D2N-PadJP2_28): U3.JP2_28
unconnected-(U3B-MIPI_CSI_RX1_D2P-PadJP2_30): U3.JP2_30
unconnected-(U3B-MIPI_CSI_RX1_D3N-PadJP2_34): U3.JP2_34
unconnected-(U3B-MIPI_CSI_RX1_D3P-PadJP2_36): U3.JP2_36
unconnected-(U3B-MIPI_CSI_RX_CLK1N-PadJP2_40): U3.JP2_40
unconnected-(U3B-MIPI_CSI_RX_CLK1P-PadJP2_42): U3.JP2_42
unconnected-(U3B-MIPI_DSI_TX0_CLKN-PadJP2_69): U3.JP2_69
unconnected-(U3B-MIPI_DSI_TX0_CLKP-PadJP2_71): U3.JP2_71
unconnected-(U3B-MIPI_DSI_TX0_D0N-PadJP2_57): U3.JP2_57
unconnected-(U3B-MIPI_DSI_TX0_D0P-PadJP2_59): U3.JP2_59
unconnected-(U3B-MIPI_DSI_TX0_D1N-PadJP2_63): U3.JP2_63
unconnected-(U3B-MIPI_DSI_TX0_D1P-PadJP2_65): U3.JP2_65
unconnected-(U3B-MIPI_DSI_TX1_CLKN-PadJP2_87): U3.JP2_87
unconnected-(U3B-MIPI_DSI_TX1_CLKP-PadJP2_89): U3.JP2_89
unconnected-(U3B-MIPI_DSI_TX1_D0N-PadJP2_75): U3.JP2_75
unconnected-(U3B-MIPI_DSI_TX1_D0P-PadJP2_77): U3.JP2_77
unconnected-(U3B-MIPI_DSI_TX1_D1N-PadJP2_81): U3.JP2_81
unconnected-(U3B-MIPI_DSI_TX1_D1P-PadJP2_83): U3.JP2_83
unconnected-(U3B-MIPI_DSI_TX1_D2N-PadJP2_93): U3.JP2_93
unconnected-(U3B-MIPI_DSI_TX1_D2P-PadJP2_95): U3.JP2_95
unconnected-(U3B-MIPI_DSI_TX1_D3N-PadJP2_94): U3.JP2_94
unconnected-(U3B-MIPI_DSI_TX1_D3P-PadJP2_96): U3.JP2_96
unconnected-(U3B-RESERVED_JP2_6-PadJP2_6): U3.JP2_6
unconnected-(U3B-RESERVED_JP2_11-PadJP2_11): U3.JP2_11
unconnected-(U3B-{\P\C\I\E\2\0\_\C\L\K\R\E\Q\_\3\V\3\_\L\}\-\P\a\d\J\P\2\_\2\)\: U3.JP2_2
unconnected-(U3B-{\P\C\I\E\2\0\_\P\E\R\S\T\_\3\V\3\_\L\}\-\P\a\d\J\P\2\_\9\)\: U3.JP2_9
unconnected-(U3B-{\P\C\I\E\2\0\_\W\A\K\E\_\3\V\3\_\L\}\-\P\a\d\J\P\2\_\4\)\: U3.JP2_4
unconnected-(U3C-HP_DET_L-PadJP3_15): U3.JP3_15
unconnected-(U3C-HP_SNS-PadJP3_8): U3.JP3_8
unconnected-(U3C-HPL_OUT-PadJP3_6): U3.JP3_6
unconnected-(U3C-HPR_OUT-PadJP3_4): U3.JP3_4
unconnected-(U3C-MIC1_IN-PadJP3_10): U3.JP3_10
unconnected-(U3C-MIC2_IN-PadJP3_12): U3.JP3_12
unconnected-(U3C-USB3_HOST1_DM-PadJP3_19): U3.JP3_19
unconnected-(U3C-USB3_HOST1_DP-PadJP3_21): U3.JP3_21
unconnected-(U3C-USB3_HOST1_SSRXN-PadJP3_24): U3.JP3_24
unconnected-(U3C-USB3_HOST1_SSRXP-PadJP3_22): U3.JP3_22
unconnected-(U3C-USB3_HOST1_SSTXN-PadJP3_16): U3.JP3_16
unconnected-(U3C-USB3_HOST1_SSTXP-PadJP3_18): U3.JP3_18
unconnected-(U5-NC-Pad6): U5.6
USB1+: U3.JP3_5
USB1-: U3.JP3_3
USB+: J6.3 U3.JP3_11 U4.1 | length 20.7
  F.Cu w0.2: v1(108.768,25.04) 109.222,25.494 U3.JP3_11@109.896,25.494
  B.Cu w0.2: J6.3@95.898,28.85 95.123,28.075 95.123,25.485 97.321,23.287 98.198,23.287 U4.1@98.648,22.837 105.937,22.837 108.14,25.04 v1(108.768,25.04)
USB-: J6.2 U3.JP3_9 U4.2 | length 22.4
  F.Cu w0.2: v1(108.268,24.249) 108.268,25.358 108.804,25.894 U3.JP3_9@109.896,25.894
  B.Cu w0.2: J6.2@93.898,28.85 94.673,28.075 94.673,25.299 97.135,22.837 U4.2@97.948,22.837 98.398,22.387 106.123,22.387 107.985,24.249 v1(108.268,24.249)
USB_D+: J1.A6 J1.B6 U3.JP2_1 U6.1 | length 47.8
  F.Cu w0.2: v1(128.063,38.719) 128.063,39.056 128.736,39.73 U3.JP2_1@128.736,40.754
  B.Cu w0.2: J1.B6@87.037,39.252 87.033,39.256 85.636,39.256 85.344,38.964 85.344,38.557 85.649,38.252 J1.A6@87.037,38.252 87.967,38.252 87.992,38.277 89.395,38.277 89.52,38.152 U6.1@89.745,38.152 89.903,37.994 90.787,37.994 91.041,38.248 127.308,38.248 127.78,38.719 v1(128.063,38.719)
USB_D-: J1.A7 J1.B7 U3.JP2_3 U6.2 | length 47.4
  F.Cu w0.2: v1(85.852,37.74) v1(85.852,38.756) ; v1(129.032,39.264) 129.136,39.368 U3.JP2_3@129.136,40.754
  B.Cu w0.2: v1(85.852,37.74) 85.864,37.752 J1.B7@87.037,37.752 ; v1(85.852,38.756) 85.856,38.752 J1.A7@87.037,38.752 87.967,38.752 87.992,38.727 89.395,38.727 89.52,38.852 U6.2@89.745,38.852 89.903,39.01 90.787,39.01 91.041,38.756 127.18,38.756 127.688,39.264 v1(129.032,39.264)
USB_OTG_ID: SW4.2 U3.JP2_5
USB_VBUS: FB1.2 J1.A4 J1.A9 J1.B4 J1.B9 | length 21.1
  F.Cu w0.508: v2(88.5,41.006) 87.5,40.006 85.5,40.006 85,39.506 85,37.006 85.5,36.506 86.5,36.506 v2(89,34.006)
  B.Cu w0.508: J1.B9@87.037,36.102 88.575,36.102 89.085,35.591 ; J1.B4@87.037,40.902 87.141,41.006 v2(88.5,41.006) ; v2(89,34.006) 89,35.506 89.085,35.591 ; FB1.2@92.202,36.262 90.957,35.017 89.66,35.017 89.085,35.591
{\E\0\_\L\E\D\L\}\: R4.2 U3.JP1_17 | length 35.8
  F.Cu w0.2: R4.2@98.806,3.387 98.997,3.196 130.302,3.196 131.936,4.83 U3.JP1_17@131.936,6.754
{\E\0\_\L\E\D\R\}\: R3.2 U3.JP1_19 | length 47.8
  F.Cu w0.2: R3.2@88.138,3.387 88.138,2.942 88.392,2.688 130.556,2.688 132.336,4.468 U3.JP1_19@132.336,6.754
pads on no net: J1.Un1 J1.Un2 J3.Un1 J3.Un2 SW4.Un1 SW4.Un2 U3.Un1 U3.Un2 U3.Un3 U3.Un4 U5.Un1 U5.Un2 U5.Un3 U5.Un4

## Polygon pours and split planes (outlines as drawn)
GND on F.Cu "F.Cu-GND" (solid, remove dead copper, pour order 6): 80,56.506 80,0.006 171.5,0.006 171.5,56.506
GND on In1.Cu "In1.Cu-GND" (solid, remove dead copper, pour order 8): 171.38,0.505 cw(c170.88,0.506) 170.88,0.006 80.5,0.006 cw(c80.5,0.506) 80,0.506 80,49.94 cw(c80.5,49.94) 80.5,50.44 170.926,50.495 cw(c170.926,49.995) 171.426,49.995
GND on In2.Cu "In2.Cu-GND" (solid, remove dead copper, pour order 9): 171.397,0.506 cw(c170.897,0.506) 170.897,0.006 80.5,0.006 cw(c80.5,0.506) 80,0.506 80,49.94 cw(c80.5,49.94) 80.5,50.44 170.897,50.481 cw(c170.897,49.981) 171.397,49.981
GND on B.Cu "B.Cu-GND" (solid, remove dead copper, pour order 5): 123,37.006 123,12.006 171,12.006 171,37.006
USB_VBUS on B.Cu "B.Cu-/USB_VBUS" (solid, remove dead copper, pour order 7): 83.5,42.006 93.5,42.006 93.5,35.006 83.5,35.006

## Keep-outs
Edge.Cuts:
  lines w0: 80,0.006 80.01,56.506 171.416,56.506 171.394,0.006 83.5,0 80,0.006
  lines w0.254: 80,0.006 80.01,56.506 171.416,56.506 171.394,0.006 83.5,0 80,0.006

## Dimensions
171.397,50.481 to 171.394,0.006 on B.Cu

## Text inside footprints (layer, text, board x,y; h text height)
U3: F.Fab "JP1" at 138.261,8.01 h0.79; F.Fab "JP2" at 138.697,46.72 h0.79; F.Fab "JP3" at 111.138,25.008 h0.79